# Altium PCB UE-12864LCD-V1.0.PcbDoc (part 1 of 2)
Units mm, origin at the board's own origin, x right, y up, seen from the top; angles counter-clockwise.
Board outline 230.2 x 185.24 mm, 2 copper layers (Top Layer, Bottom Layer); 288 components, 149 nets, 862 pads, 465 vias.
Unrouted connection lines stored in the file: 29.
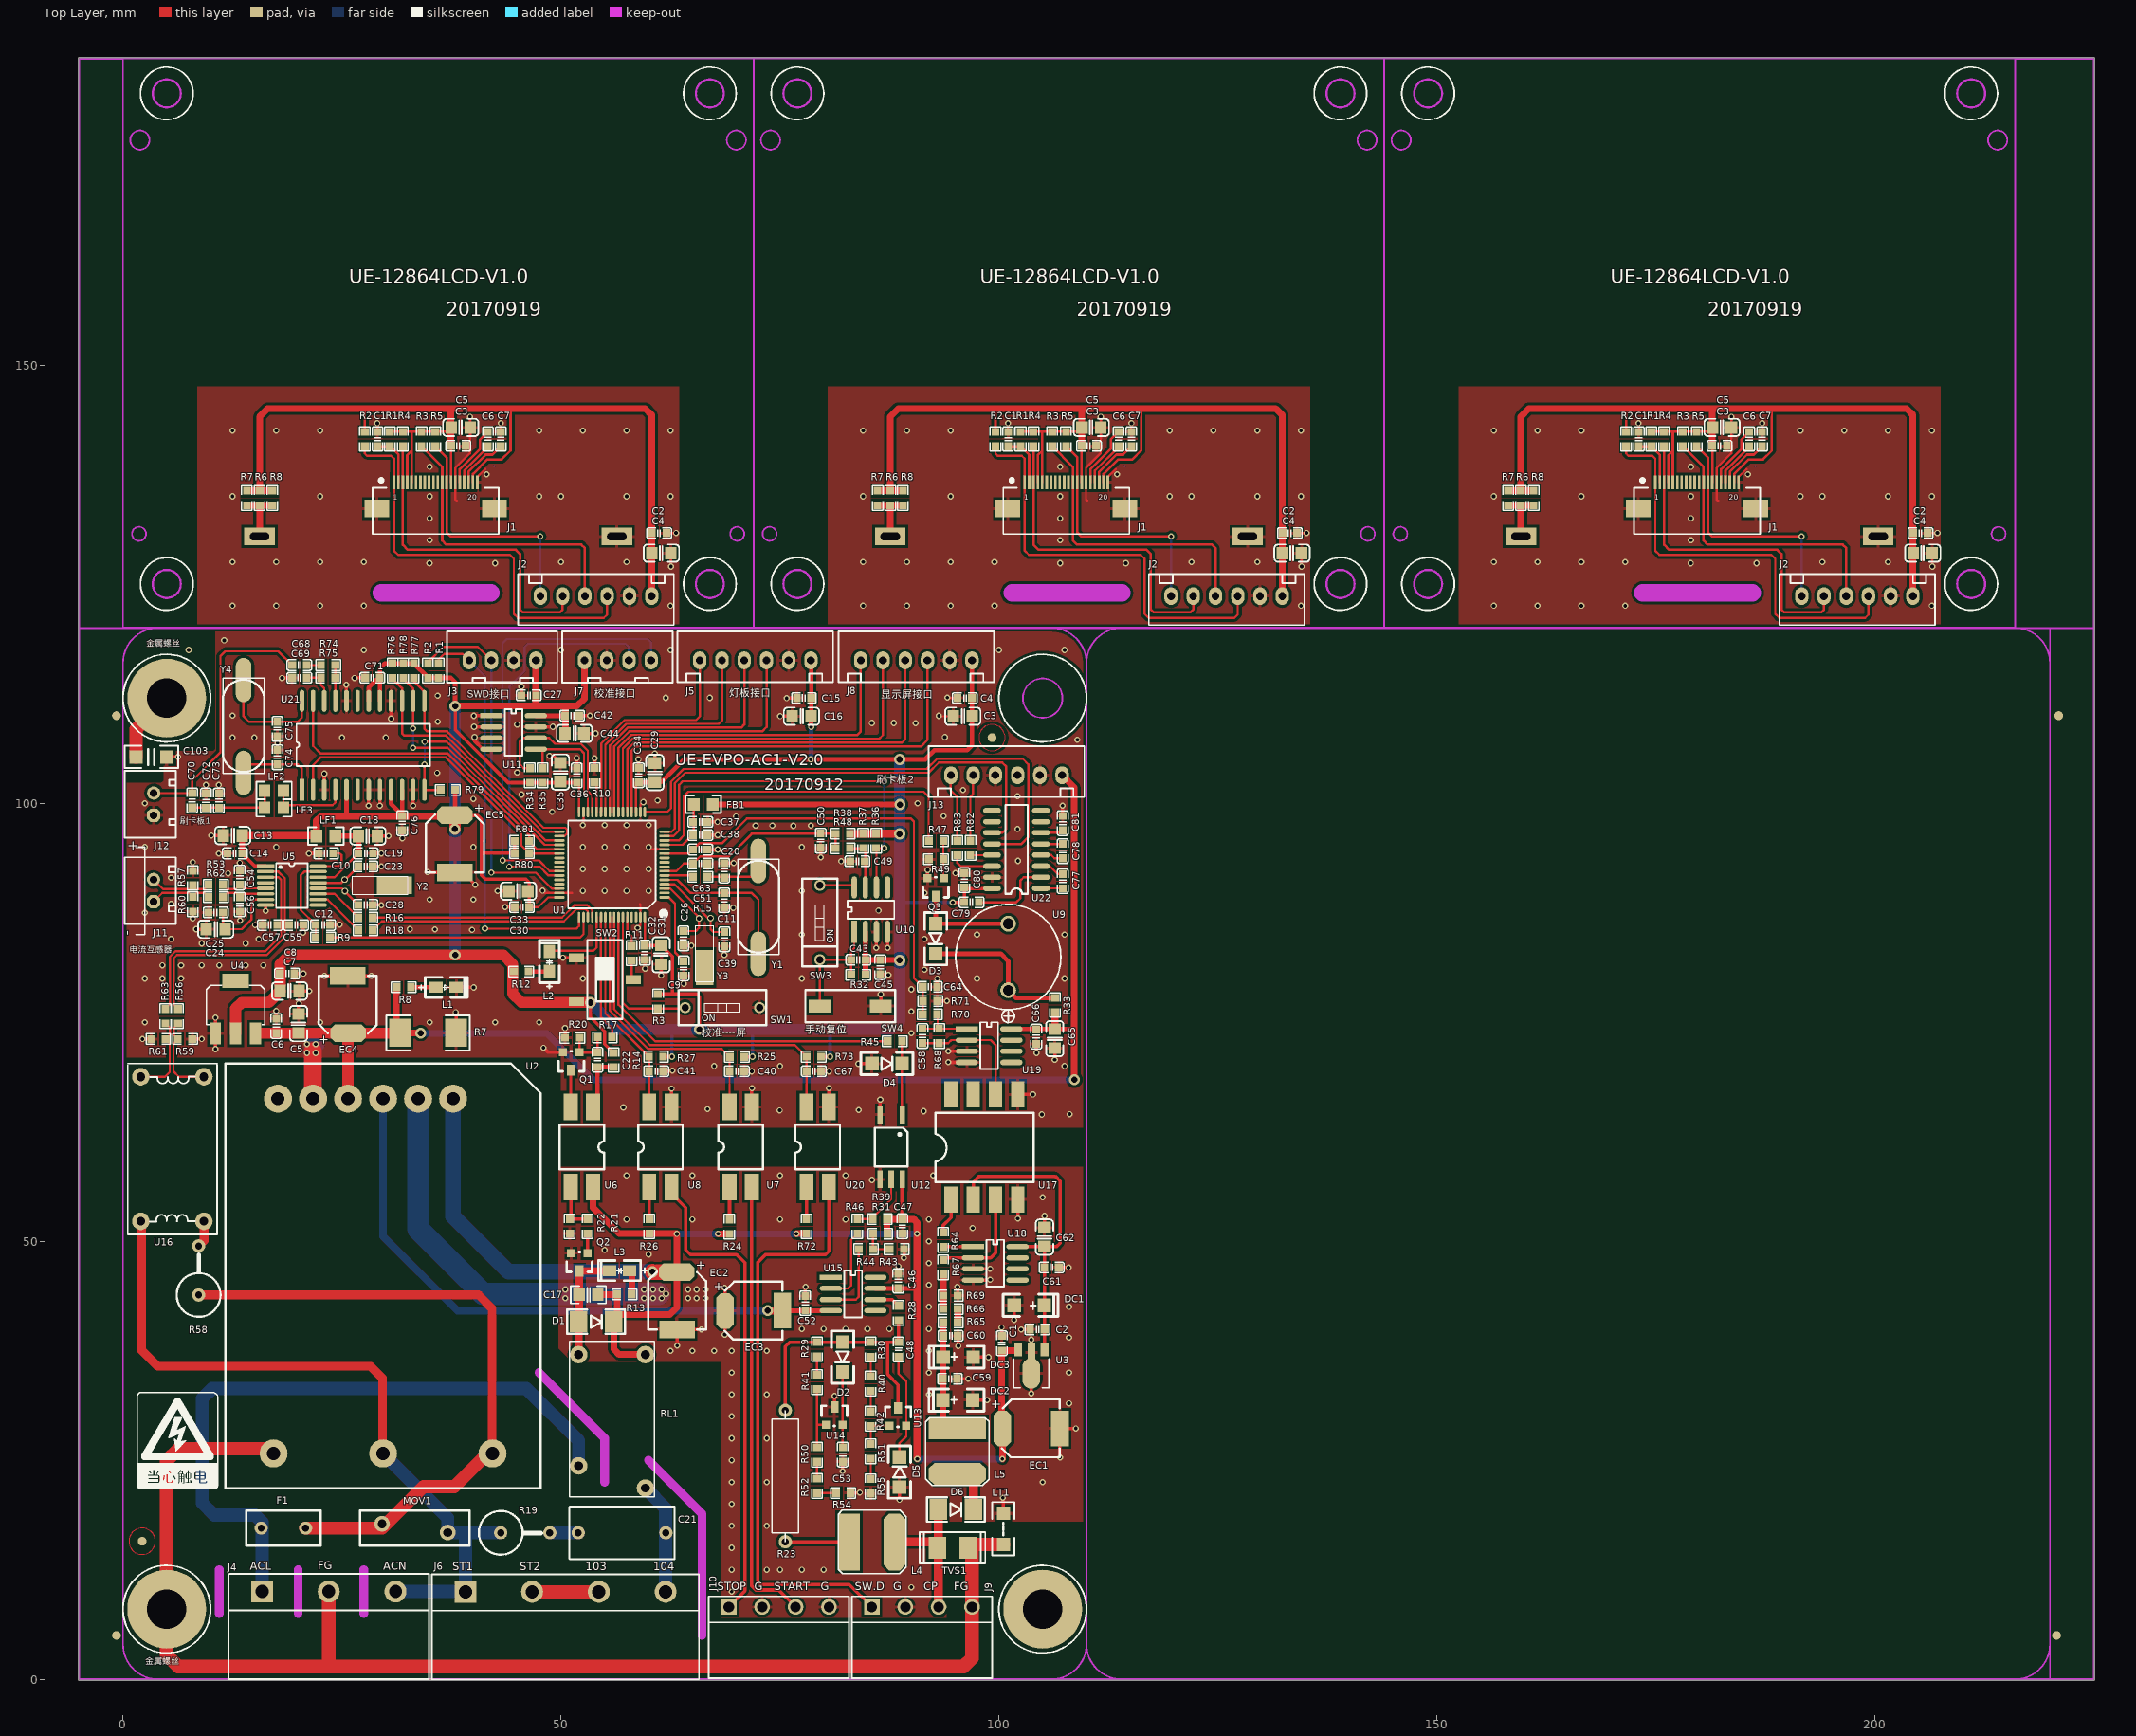
[diagram p0: Top Layer view]
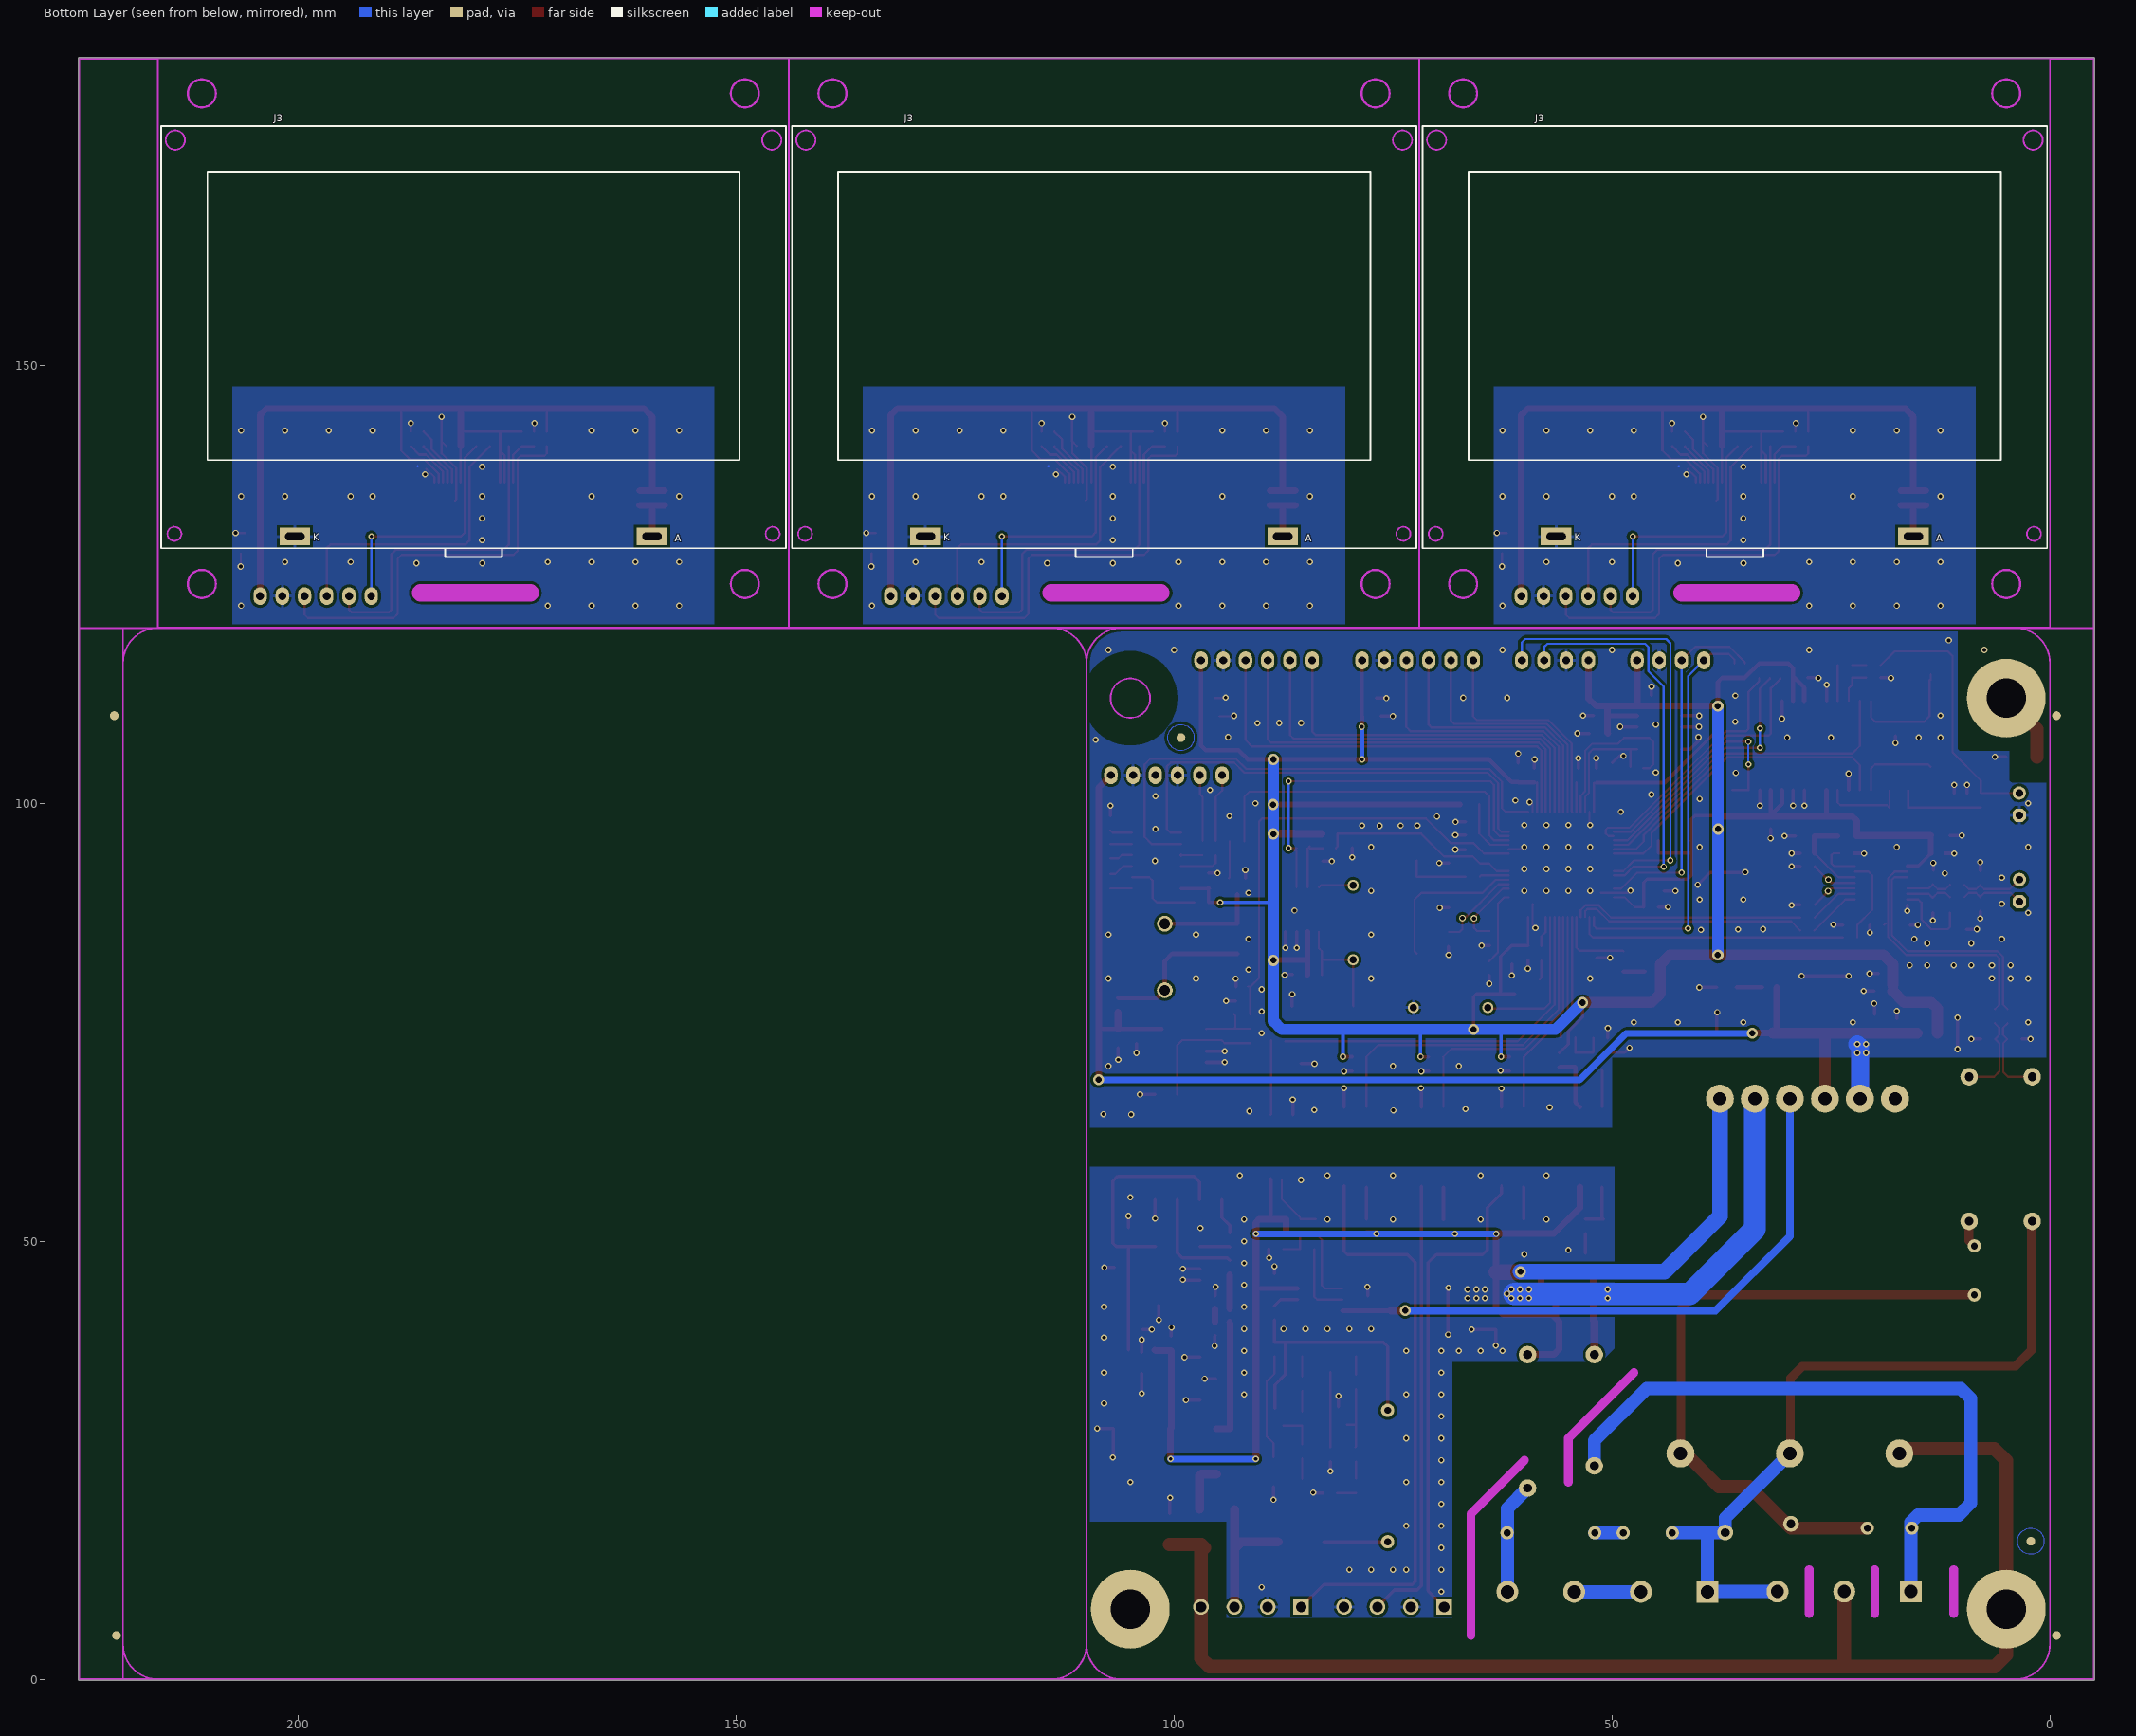
[diagram p1: Bottom Layer view, seen from below]

## Layer stack, top to bottom
Top Layer: signal copper 0.0356
Dielectric: core 0.32, FR-4, Dk 4.8
Bottom Layer: signal copper 0.0356

## Board outline
-5.1,0 ccw(c-5,0) -5,-0.1 4,-0.1 106,-0.1 225,-0.1 ccw(c225,0) 225.1,0 225.1,185 ccw(c225,185) 225,185.1 216.08,185.1 ccw(c216,185.04) 216,185.141 0,185.141 ccw(c0,185.04) -0.08,185.1 -5,185.1 ccw(c-5,185) -5.1,185

## Design rules (kind name [scope] priority, off if disabled: settings)
Clearance [InPoly] p1: gap=0.305
Clearance Clearance_1 [All] p2: gap=0.178
ComponentClearance [All] p1 off: gap=0.025 collisioncheckmode=3 verticalgap=0.025 showdistances=FALSE
FabricationTestpoint [(IsPad And (OnTopLayer Or OnBottomLayer))] p1: side=3 testpointundercomponent=TRUE minsize=1.016 maxsize=2.54 preferedsize=1.524 minholesize=0 maxholesize=1.016 preferedholesize=0.813 testpointgrid=0.025 allowsidetop=TRUE allowsidebottom=TRUE usegrid=TRUE gridtolerance=0
HoleSize [All] p1: absolutevalues=TRUE maxlimit=5.08 minlimit=0.025 maxpercent=80.000 minpercent=20.000
MinimumSolderMaskSliver [All] p1: minsoldermaskwidth=0
PolygonConnect [IsVia] p1: connectstyle=Direct reliefconductorwidth=0.254 reliefentries=4 polygonreliefangle="90 Angle" airgapwidth=0.254
PolygonConnect PolygonConnect_1 [All] p2: connectstyle=Relief reliefconductorwidth=0.381 reliefentries=4 polygonreliefangle="90 Angle" airgapwidth=0.254
RoutingVias [All] p1: holewidth=0.711 width=1.27 viastyle="Through Hole" minholewidth=0.254 minwidth=0.254 maxholewidth=0.711 maxwidth=1.27
SilkToSilkClearance [All] p1: silktosilkclearance=0
SilkToSolderMaskClearance [IsPad] p1: minsilkscreentomaskgap=0 clearancetoexposedcopper=TRUE
SolderMaskExpansion [All] p1: expansion=0.102
Width [All] p1: maxlimit=10 minlimit=0.013 preferedwidth=0.254 minimp=50.000000 maximp=50.000000 favimp=50.000000
22 further rules are at their usual default settings.

## Classes and differential pairs
component class 迷你随车充V2.0(STM32)比亚迪: C1 C2 C3 C4 C5 C6 C7 C8 C9 C10 C11 C12 C13 C14 C15 C16 C17 C18 C19 C20 C21 C22 C23 C24 C25 C26 C27 C28 C29 C30 C31 C32 C33 C34 C35 C36 C37 C38 C39 C40 C41 C42 C43 C44 C45 C46 C47 C48 C49 C50 C51 C52 C53 C54 C55 C56 C57 C58 C59 C60 C61 C62 C63 C64 C65 C66 C67 C68 C69 C70 C71 C72 C73 C74 C75 C76 C77 C78 C79 C80 C81 C103 D1 D2 D3 D4 D5 D6 DC1 DC2 DC3 EC1 EC2 EC3 EC4 EC5 F1 FB1 G J3 J4 J5 J6 J7 J8 J9 J10 J11 J12 J13 L1 L2 L3 L4 L5 LF1 LF2 LF3 LT1 MOV1 Q1 Q2 Q3 R1 R2 R3 R7 R8 R9 R10 R11 R12 R13 R14 R15 R16 R17 R18 R19 R20 R21 R22 R23 R24 R25 R26 R27 R28 R29 R30 R31 R32 R33 R34 R35 R36 R37 R38 R39 R40 R41 R42 R43 R44 R45 R46 R47 R48 R49 R50 R51 R52 R53 R54 R55 R56 R57 R58 R59 R60 R61 R62 R63 R64 R65 R66 R67 R68 R69 R70 R71 R72 R73 R74 R75 R76 R77 R78 R79 R80 R81 R82 R83 RL1 SW1 SW2 SW3 SW4 TVS1 U1 U2 U3 U4 U5 U6 U7 U8 U9 U10 U11 U12 U13 U14 U15 U16 U17 U18 U19 U20 U21 U22 Y1 Y2 Y3 Y4

## Components (designator, comment, footprint, x,y, rotation, side; value= is the part's Value field where it differs from the comment)
C1 "0.1uF" 0603C 173.058,141.579 r270 top
C1 "0.1uF" 0603C 101.058,141.579 r270 top
C1 "0.1uF" 0603C 29.058,141.579 r270 top
C1 "104" 0603C 100.33,38.354 r270 top
C2 "104" 0603C 205.214,130.835 r180 top
C2 "104" 0603C 133.214,130.835 r180 top
C2 "104" 0603C 61.214,130.835 r180 top
C2 "104" 0603C 104.394,39.929 r0 top
C3 "104" 0603C 182.278,140.792 r180 top
C3 "104" 0603C 110.278,140.792 r180 top
C3 "104" 0603C 38.278,140.792 r180 top
C3 "10uF" 0805C 95.885,109.931 r180 top
C4 "10uF" 0805C 205.468,128.549 r0 top
C4 "10uF" 0805C 133.468,128.549 r0 top
C4 "10uF" 0805C 61.468,128.549 r0 top
C4 "104" 0603C 96.114,112.014 r0 top
C5 "10uF" 0805C 182.557,142.9 r0 top
C5 "10uF" 0805C 110.557,142.9 r0 top
C5 "10uF" 0805C 38.557,142.9 r0 top
C5 "10uF" 0805C 20.041,74.854 r90 top
C6 "105" 0603C 185.656,141.579 r90 top
C6 "105" 0603C 113.656,141.579 r90 top
C6 "105" 0603C 41.656,141.579 r90 top
C6 "0.1uF" 0603C 17.501,74.574 r90 top
C7 "105" 0603C 187.129,141.579 r90 top
C7 "105" 0603C 115.129,141.579 r90 top
C7 "105" 0603C 43.129,141.579 r90 top
C7 "10uF" 0805C 19.025,78.562 r0 top
C8 "0.1uF" 0603C 18.745,80.569 r0 top
C9 "104" 0603C 64.008,81.153 r270 top
C10 "104" 0603C 23.19,94.285 r180 top
C11 "20P" 0603C 68.631,88.925 r270 top
C12 "104" 0603C 22.835,86.106 r0 top
C13 "10uF" 0805C 12.522,96.317 r180 top
C14 "104" 0603C 12.776,94.285 r180 top
C15 "0.1uF" 0603C 77.749,112.014 r180 top
C16 "10uF" 0805C 77.47,109.931 r180 top
C17 "104" 0805C 53.137,43.891 r180 top
C18 "10uF" 0805C 27.965,96.266 r0 top
C19 "104" 0603C 27.711,94.285 r0 top
C20 "20P" 0603C 68.631,92.329 r90 top
C21 "0.1uF/630V" "R1-2 卧CBB" 56.972,16.713 r0 top
C22 "104" 0603C 54.174,70.717 r90 top
C23 "20P" 0603C 27.686,92.786 r0 top
C24 "10uF" 0805C 10.592,85.623 r180 top
C25 "104" 0603C 10.592,87.528 r180 top
C26 "10P" 0603C 63.983,84.582 r270 top
C27 "104" 0603C 46.33,112.319 r0 top
C28 "20P" 0603C 27.686,88.392 r0 top
C29 "10uF" 0805C 60.731,103.505 r90 top
C30 "104" 0603C 45.542,88.138 r180 top
C31 "10uF" 0805C 61.443,82.702 r270 top
C32 "104" 0603C 59.588,82.931 r270 top
C33 "10uF" 0805C 45.136,89.967 r180 top
C34 "104" 0603C 58.877,103.2 r90 top
C35 "10uF" 0805C 49.936,103.556 r90 top
C36 "104" 0603C 51.816,103.175 r90 top
C37 "1uF" 0603C 65.913,97.866 r0 top
C38 "104" 0603C 65.913,96.368 r0 top
C39 "10P" 0603C 68.656,84.48 r270 top
C40 "104" 0603C 70.079,69.418 r0 top
C41 "104" 0603C 60.884,69.418 r0 top
C42 "0.1uF" 0603C 51.283,110.007 r0 top
C43 "104" 0603C 83.961,82.124 r180 top
C44 "10uF" 0805C 51.537,107.975 r180 top
C45 "104" 0603C 86.462,81.28 r270 top
C46 "104" 0603C 88.519,45.466 r90 top
C47 "104" 0603C 88.976,51.714 r270 top
C48 "104" 0603C 88.546,37.648 r90 top
C49 "104" 0603C 83.845,93.37 r0 top
C50 "104" 0603C 79.654,95.733 r90 top
C51 "104" 0603C 65.913,93.116 r180 top
C52 "104" 0603C 77.902,42.926 r270 top
C53 "104" 0603C 82.169,25.654 r270 top
C54 "33nF" 0603C 13.335,91.516 r90 top
C55 "33nF" 0603C 19.761,86.106 r0 top
C56 "33nF" 0603C 13.335,88.443 r270 top
C57 "33nF" 0603C 16.789,86.106 r180 top
C58 "103" 0603C 91.272,73.435 r270 top
C59 "104" 0603C 94.412,34.29 r0 top
C60 "103" 0603C 94.488,39.218 r0 top
C61 "104" 0603C 106.02,47.015 r180 top
C62 "10uF" 0805C 105.207,50.47 r90 top
C63 "104" 0603C 65.913,94.717 r180 top
C64 "103" 0603C 92.126,79.045 r180 top
C65 "10uF" 0805C 106.375,73.127 r90 top
C66 "104" 0603C 104.267,73.355 r90 top
C67 "104" 0603C 78.867,69.418 r0 top
C68 "15pF" 0603C 20.142,115.773 r0 top
C69 "103" 0603C 20.142,114.325 r180 top
C70 "27pF" 0603C 7.899,100.33 r270 top
C71 "104" 0603C 28.473,114.325 r180 top
C72 "68pF" 0603C 9.474,100.305 r270 top
C73 "15pF" 0603C 10.947,100.305 r90 top
C74 "20pF" 0603C 17.628,105.258 r90 top
C75 "20pF" 0603C 17.628,108.483 r90 top
C76 "104" 0603C 31.877,97.739 r90 top
C77 "0.1uF" 0603C 107.29,91.11 r270 top
C78 "0.1uF" 0603C 107.29,94.539 r270 top
C79 "0.1uF" 0603C 96.876,88.697 r180 top
C80 "1uF" 0603C 96.063,91.211 r270 top
C81 "0.1uF" 0603C 107.29,97.739 r270 top
C103 "102" 1206C 3.251,105.283 r0 top
D1 "1N4007" DO-214AC 54.026,40.818 r0 top
D2 "1N4148" 1206D 82.171,36.779 r270 top
D3 "1N4148" 1206D 92.786,84.531 r270 top
D4 "1N4148" 1206D 87.224,70.282 r0 top
D5 "1N4148" 1206D 88.646,23.647 r90 top
D6 "1N4007" DO-214AC 95.098,19.38 r0 top
DC1 "10uF,16V" CA1206 105.181,42.697 r0 top
DC2 "10uF,16V" CA1206 93.599,31.852 r180 top
DC3 "10uF,16V" CA1206 93.624,36.754 r180 top
EC1 "100uF,25V" C100UF16VEJ 100.406,28.626 r0 top
EC2 "100uF,25V" C100UF16VEJ 63.246,46.482 r270 top
EC3 "100uF,25V" C100UF16VEJ 68.732,42.062 r0 top
EC4 "100uF,25V" C100UF16VEJ 25.679,73.736 r90 top
EC5 "100uF,16V" C100UF16VEJ 37.897,98.654 r270 top
F1 "2A/250V" 方形保险丝 18.313,17.247 r180 top
FB1 "220R @ 100MHZ" 0805R 66.243,99.873 r180 top
J1 "CON20" FPC20-0.5mm 179.698,135.139 r0 top
J1 "CON20" FPC20-0.5mm 107.698,135.139 r0 top
J1 "CON20" FPC20-0.5mm 35.698,135.139 r0 top
J2 "CON6" CON06_2.54 204.35,123.647 r180 top
J2 "CON6" CON06_2.54 132.35,123.647 r180 top
J2 "CON6" CON06_2.54 60.35,123.647 r180 top
J3 "CON2" JXL12864G-1504 215.628,129.108 r180 bottom
J3 "CON2" JXL12864G-1504 143.628,129.108 r180 bottom
J3 "CON2" JXL12864G-1504 71.628,129.108 r180 bottom
J3 "CON4" CON04_2.54 43.332,116.307 r0 top
J4 "CON3" LS-3P-7.62MM 23.495,10.008 r0 top
J5 "CON6" CON06_2.54 65.837,116.307 r0 top
J6 "CON4" LS-4P-7.62MM 50.521,9.982 r0 top
J7 "CON4" CON04_2.54 56.49,116.307 r0 top
J8 "CON6" CON06_2.54 84.226,116.307 r0 top
J9 "CON4" KF2EDG-4P-3.81MM 85.496,8.255 r0 top
J10 "CON4" KF2EDG-4P-3.81MM 69.164,8.255 r0 top
J11 "CON2" CON2P 3.48,88.748 r90 top
J12 "CON2" CON2P 3.505,98.628 r90 top
J13 "CON6" CON06_2.54 94.513,103.2 r0 top
L1 "Green" D0805 35.763,78.994 r90 top
L2 "Green" D0805 48.683,80.795 r180 top
L3 "Green" D0805 57.836,46.634 r270 top
L4 "100uH" LC7*7*3 85.496,15.672 r180 top
L5 "100uH" LC7*7*3 95.25,26.035 r90 top
LF1 "1.0uH" 0805R 23.165,96.266 r0 top
LF2 "1.0uH" 0805R 17.247,101.448 r0 top
LF3 "1.0uH" 0805R 17.247,99.466 r0 top
LT1 "10uH" 1206L 100.508,17.17 r270 top
MOV1 "14D471K" 10D471K 33.325,17.247 r180 top
Q1 "9013" SOT23 52.117,71.583 r180 top
Q2 "9013" SOT23 53.061,48.666 r180 top
Q3 "8050" SOT23 93.751,91.44 r180 top
R1 "10K" 0603R 174.48,141.579 r270 top
R1 "10K" 0603R 102.48,141.579 r270 top
R1 "10K" 0603R 30.48,141.579 r270 top
R1 "10K" 0603R 36.017,115.138 r270 top
R2 "10K" 0603R 171.61,141.58 r90 top
R2 "10K" 0603R 99.61,141.58 r90 top
R2 "10K" 0603R 27.61,141.58 r90 top
R2 "10K" 0603R 34.823,115.138 r270 top
R3 "10K" 0603R 178.087,141.58 r90 top
R3 "10K" 0603R 106.087,141.58 r90 top
R3 "10K" 0603R 34.087,141.58 r90 top
R3 "10K" 0603R 61.087,77.394 r270 top
R4 "10K" 0603R 175.953,141.58 r90 top
R4 "10K" 0603R 103.953,141.58 r90 top
R4 "10K" 0603R 31.953,141.58 r90 top
R5 "10K" 0603R 179.662,141.58 r90 top
R5 "10K" 0603R 107.662,141.58 r90 top
R5 "10K" 0603R 35.662,141.58 r90 top
R6 "47R" 0603R 159.596,134.849 r270 top
R6 "47R" 0603R 87.596,134.849 r270 top
R6 "47R" 0603R 15.596,134.849 r270 top
R7 "47R" 0603R 158.148,134.849 r270 top
R7 "47R" 0603R 86.148,134.849 r270 top
R7 "47R" 0603R 14.148,134.849 r270 top
R7 "100R" 2512R 34.823,73.787 r180 top
R8 "47R" 0603R 161.043,134.849 r270 top
R8 "47R" 0603R 89.043,134.849 r270 top
R8 "47R" 0603R 17.043,134.849 r270 top
R8 "1.5K" 0603R 32.055,78.994 r0 top
R9 "47R" 0603R 22.835,84.684 r0 top
R10 "10K" 0603R 53.848,103.2 r270 top
R11 "10K" 0603R 58.064,82.88 r90 top
R12 "1.5K" 0603R 45.466,80.797 r180 top
R13 "10K" 0603R 57.252,43.917 r180 top
R14 "2K" 0603R 56.007,70.688 r90 top
R15 "200R" 0603R 65.913,91.618 r180 top
R16 "10R" 0603R 27.686,86.944 r0 top
R17 "10K" 0603R 55.016,73.279 r0 top
R18 "10R" 0603R 27.686,85.496 r0 top
R19 "100R/2W" R1-2 43.129,16.713 r0 top
R20 "3K" 0603R 51.308,73.228 r180 top
R21 "5.1K" 0603R 53.035,51.689 r270 top
R22 "4K7" 0603R 51.003,51.689 r270 top
R23 "1K /1W" R1-1 75.616,23.19 r270 top
R24 "10K" 0603R 69.24,51.664 r270 top
R25 "10K" 0603R 70.104,71.044 r0 top
R26 "10K" 0603R 60.096,51.689 r270 top
R27 "10K" 0603R 60.858,71.069 r0 top
R28 "10R" 0603R 88.544,41.808 r90 top
R29 "20K/1%" 0603R 79.224,37.674 r90 top
R30 "4K7/1%" 0603R 85.371,37.648 r90 top
R31 "100K" 0603R 86.462,50.851 r180 top
R32 "10K" 0603R 83.961,80.422 r0 top
R33 "10R" 0603R 106.401,76.962 r270 top
R34 "10k" 0603R 46.457,103.175 r90 top
R35 "10K" 0603R 47.904,103.175 r90 top
R36 "10K" 0603R 85.979,95.707 r270 top
R37 "10K" 0603R 84.506,95.707 r270 top
R38 "10K" 0603R 82.169,96.52 r180 top
R39 "100K" 0603R 86.411,52.527 r180 top
R40 "51R/1%" 0603R 85.371,33.738 r90 top
R41 "2K7/1%" 0603R 79.224,33.934 r90 top
R42 "1K1/1%" 0603R 85.371,29.743 r90 top
R43 "100K" 0603R 88.341,49.098 r0 top
R44 "10K" 0603R 84.836,49.098 r0 top
R45 "200R" 0603R 88.113,72.822 r0 top
R46 "10K" 0603R 83.845,51.689 r90 top
R47 "4K7" 0603R 92.837,95.682 r180 top
R48 "47R" 0603R 82.169,94.869 r180 top
R49 "10K" 0603R 92.837,93.599 r0 top
R50 "1K1/1%" 0603R 79.224,25.654 r90 top
R51 "2K7/1%" 0603R 85.371,26.015 r90 top
R52 "51R/1%" 0603R 79.224,22.073 r90 top
R53 "1.2K" 0603R 10.592,90.678 r0 top
R54 "4K7/1%" 0603R 82.22,21.26 r180 top
R55 "20K/1%" 0603R 85.371,22.022 r90 top
R56 "1.2K" 0603R 6.274,75.692 r90 top
R57 "22R,1%" 0603R 7.976,91.465 r270 top
R58 "110K/1W" R1-2 8.636,43.866 r90 top
R59 "75R,1%(原100)" 0603R 7.087,73.083 r180 top
R60 "22R,1%" 0603R 7.976,88.468 r270 top
R61 "75R,1%" 0603R 4.039,73.076 r180 top
R62 "1.2K" 0603R 10.592,89.281 r0 top
R63 "1.2K" 0603R 4.851,75.692 r90 top
R64 "200R/1%" 0603R 93.65,50.165 r90 top
R65 "33K/1%" 0603R 94.488,40.742 r0 top
R66 "33K/1%" 0603R 94.488,42.266 r180 top
R67 "31K6/1%" 0603R 93.65,47.015 r90 top
R68 "31K6/1%" 0603R 93.177,73.435 r270 top
R69 "10K/1%" 0603R 94.488,43.79 r180 top
R70 "10K/1%" 0603R 92.126,75.921 r180 top
R71 "10K/1%" 0603R 92.151,77.419 r0 top
R72 "10K" 0603R 78.029,51.689 r270 top
R73 "10K" 0603R 78.867,71.069 r0 top
R74 "2K7" 0603R 23.419,115.773 r180 top
R75 "820R" 0603R 23.419,114.325 r0 top
R76 "10K" 0603R 30.785,115.138 r90 top
R77 "10K" 0603R 33.198,115.138 r90 top
R78 "10K" 0603R 32.004,115.138 r90 top
R79 "10K" 0603R 37.084,101.524 r0 top
R80 "10K" 0603R 45.542,94.31 r180 top
R81 "10K" 0603R 45.542,95.707 r180 top
R82 "10R" 0603R 96.749,94.894 r90 top
R83 "10R" 0603R 95.25,94.894 r90 top
RL1 "JQ1P-12V" HF32F-12V 53.035,37.059 r90 top
SW1 "排针" SW1 64.16,76.683 r270 top
SW2 "K3-1235S-F1" K3-1235S-F1 55.016,79.858 r270 top
SW3 "拨码开关" SW1 79.553,82.118 r0 top
SW4 "按键" SW 83.033,76.835 r0 top
TVS1 "BA301N" 3528TVS 94.75,15 r0 top
U1 "STM32F103R8T6" LQFP64 61.824,89.256 r90 top
U2 "LH05-10C0515-01" LH05-10C0515-01 29.693,46.025 r90 top
U3 "LM78L05" SOT-89 105.207,37.592 r180 top
U4 "AMS1117-3.3" SOT223 12.852,76.733 r0 top
U5 "HT7017/3.3V" SSOP16 19.279,90.602 r0 top
U6 "PS2501L-1" DIP-4 53.67,65.311 r0 top
U7 "PS2501L-1" DIP-4 69.24,56.197 r180 top
U8 "PS2501L-1" DIP-4 60.071,56.197 r180 top
U9 "BELL" BUZZ 101.067,82.448 r270 top
U10 "SP706SEN" SOP8 83.49,85.319 r90 top
U11 "AT24C16" SOP8 42.062,109.982 r0 top
U12 "TLP114" P113 88.96,64.455 r270 top
U13 "TL431" SOT23 87.528,28.905 r0 top
U14 "TL431" SOT23 80.264,29.032 r0 top
U15 "LM218D" SOP8 80.823,45.872 r0 top
U16 "ZMPT107/2mA:2mA" ZMPT107 5.639,60.528 r90 top
U17 "HCNR201" "HCNR201 - S" 94.541,54.754 r90 top
U18 "LM258" SOP8 97.053,49.378 r0 top
U19 "LM258" SOP8 96.352,74.222 r0 top
U20 "PS2501L-1" DIP-4 78.029,56.197 r180 top
U21 "FM1702SL" SOP24 20.447,101.549 r0 top
U22 "SP3232EEN" SO-16 104.8,90.272 r180 top
Y1 "8M" ZS_SMD 72.542,88.113 r90 top
Y2 "6M" ZS-32.768 28.067,90.627 r0 top
Y3 "32.768KHz" ZS-32.768 66.421,84.125 r270 top
Y4 "13.560M" ZS_SMD 13.767,108.763 r90 top

## Footprints (in the part's own frame and the unit in brackets; to place one, negate y for a bottom-side part, rotate by r counter-clockwise, add the part's x,y. Pads: shape width x height; smd on the part's side, far side on the other; paste and mask are expansions set on the pad)
10D471K [mm]
  round 1.8 hole 1: 1(-3.75,0.5) 2(3.75,-0.5)
  silkscreen extent -6.25,-2 6.25,2
0603C [mil]
  rect 35x35 smd: 1(-32.5,0) 2(32.5,0)
  silkscreen extent -55,-24 55,24
0603R [mil]
  rect 35x35 smd: 1(-32.5,0) 2(32.5,0)
  silkscreen extent -55,-24 55,24
0805C [mil]
  rect 52x56 smd: 1(-42.5,0) 2(42.5,0)
  silkscreen extent -80,-39 80,39
0805R [mil]
  rect 52x56 smd: 1(-42.5,0) 2(42.5,0)
  silkscreen extent -80,-39 79,39
1206C [mil]
  rect 60x60 smd: 1(-70,0) 2(70,0)
  silkscreen extent -120,-50 120,50
1206D [mil]
  rect 60x60 smd: 1(-67.5,0) 2(67.5,0)
  silkscreen extent -118,-50 117,50
1206L [mil]
  rect 60x60 smd: 1(-70,0) 2(70,0)
  silkscreen extent -120,-50 120,50
2512R [mm]
  rect 2.5x3.2 smd: 1(-3.2,0) 2(3.2,0)
  silkscreen extent -4.75,-2 4.75,2
3528TVS [mil]
  rect 80x100 smd: 1(70,0) 2(-70,0)
  silkscreen extent -150,-70 146,70
BUZZ [mm]
  round 1.8 hole 1.2: 1(3.8,0) 2(-3.8,0)
  silkscreen extent -6,-6 7.47,6
C100UF16VEJ [mil]
  oct 80x160 smd: 1(-0.01,-0.43)
  rect 80x160 smd: 2(257.94,0.35)
  silkscreen extent -2,-130 258,130
CA1206 [mil]
  rect 60x60 smd: 1(-0.08,-0.48) 2(-135.08,-0.48)
  silkscreen extent -185,-50 62,50
CON2P [mil]
  oct 60x60 hole 33.47: 1(0.08,-0.13)
  round 60 hole 33.47: 2(100.08,-0.13)
  silkscreen extent -100,-100 200,130
CON04_2.54 [mil]
  oval 60x80 hole 35: 1(-150,0) 2(-50,0) 3(50,0) 4(150,0)
  silkscreen extent -250,-100 246,130
CON06_2.54 [mil]
  oval 60x80 hole 35: 1(0,0) 2(100,0) 3(200,0) 4(300,0) 5(400,0) 6(500,0)
  silkscreen extent -100,-98 600,130
D0805 [mil]
  rect 50x60 smd: 1(-0.34,-0.09) 2(-0.34,-90.09)
  silkscreen extent -45,-140 45,77
DIP-4 [mm]
  rect 1.6x3 smd: 1(-0.008,0.015) 2(-2.548,0.015) 3(-2.548,-9.129) 4(-0.008,-9.129)
  silkscreen extent -3.82,-7.1 1.26,-2.02
DO-214AC [mm]
  rect 2x2.4 smd: 1(-2,0) 2(2,0)
  silkscreen extent -3.3,-1.4 3.3,1.4
FPC20-0.5mm [mm]
  rect 0.3x1.6 smd: 1(-4.75,1.5) 2(-4.25,1.5) 3(-3.75,1.5) 4(-3.25,1.5) 5(-2.75,1.5) 6(-2.25,1.5) 7(-1.75,1.5) 8(-1.25,1.5) 9(-0.75,1.5) 10(-0.25,1.5) 11(0.25,1.5) 12(0.75,1.5) 13(1.25,1.5) 14(1.75,1.5) 15(2.25,1.5) 16(2.75,1.5) 17(3.25,1.5) 18(3.75,1.5) 19(4.25,1.5) 20(4.75,1.5)
  rect 2.8x2 smd: 21(-6.7,-1.5) 22(6.7,-1.5)
  silkscreen extent -7.2,-4.4 7.2,1.85
"HCNR201 - S" [mm]
  rect 3x1.5 smd: 1(0,0) 2(0,-2.54) 3(0,-5.08) 4(0,-7.62) 5(12,-7.62) 6(12,-5.08) 7(12,-2.54) 8(12,0)
  silkscreen extent 2,-9.41 9.9,1.79
HF32F-12V [mm]
  round 2 hole 1: 1(0,1.016) 2(0,-6.604) 3(-12.7,1.016) 4(-15.24,-6.604)
  silkscreen extent -16.26,-7.62 1.52,2.03
JXL12864G-1504 [mm]
  rect 3.5x2 hole 0.9 slot 2.2 at 0 deg: 1(56.032,1.346) 2(15.25,1.346)
  Keep-Out Layer circle w0.2: c1.5,1.65 r0.8
  Keep-Out Layer circle w0.2: c69.8,1.65 r0.8
  Keep-Out Layer circle w0.2: c69.7,46.6 r1.1
  Keep-Out Layer circle w0.2: c1.6,46.6 r1.1
  silkscreen extent 0,-1 71.3,48.2
K3-1235S-F1 [mm]
  rect 1x1.7 smd: 1(-2.5,-3.25) 2(0,3.25) 3(2.5,-3.25)
  silkscreen extent -4.5,-2 4.5,2
KF2EDG-4P-3.81MM [mm]
  rect 1.8x1.8 hole 1.2: 1(0,0)
  round 1.8 hole 1.2: 2(3.81,0) 3(7.62,0) 4(11.43,0)
  silkscreen extent -2.3,-8.15 13.74,1.2
LC7*7*3 [mm]
  oct 2.5x6.5 smd: 1(-2.6,0)
  rect 2.5x6.5 smd: 2(2.6,0)
  silkscreen extent -3.94,-3.61 3.84,3.61
LH05-10C0515-01 [mm] "48.5*36*20.5"
  round 3.2 hole 1.5: 1(-20.25,12.5) 2(-20.25,0) 3(-20.25,-12.5) 4(20.25,8) 5(20.25,4) 6(20.25,0) 7(20.25,-4) 8(20.25,-8) ""(20.25,12)
  silkscreen extent -24.25,-18 24.25,18
LQFP64 [mm]
  oval 0.3x1.2 smd: 1(0,0) 2(0.5,0) 3(1,0) 4(1.5,0) 5(2,0) 6(2.5,0) 7(3,0) 8(3.5,0) 9(4,0) 10(4.5,0) 11(5,0) 12(5.5,0) 13(6,0) 14(6.5,0) 15(7,0) 16(7.5,0) 33(7.5,12) 34(7,12) 35(6.5,12) 36(6,12) 37(5.5,12) 38(5,12) 39(4.5,12) 40(4,12) 41(3.5,12) 42(3,12) 43(2.5,12) 44(2,12) 45(1.5,12) 46(1,12) 47(0.5,12) 48(0,12)
  oval 1.2x0.3 smd: 17(9.75,2.25) 18(9.75,2.75) 19(9.75,3.25) 20(9.75,3.75) 21(9.75,4.25) 22(9.75,4.75) 23(9.75,5.25) 24(9.75,5.75) 25(9.75,6.25) 26(9.75,6.75) 27(9.75,7.25) 28(9.75,7.75) 29(9.75,8.25) 30(9.75,8.75) 31(9.75,9.25) 32(9.75,9.75) 49(-2.25,9.75) 50(-2.25,9.25) 51(-2.25,8.75) 52(-2.25,8.25) 53(-2.25,7.75) 54(-2.25,7.25) 55(-2.25,6.75) 56(-2.25,6.25) 57(-2.25,5.75) 58(-2.25,5.25) 59(-2.25,4.75) 60(-2.25,4.25) 61(-2.25,3.75) 62(-2.25,3.25) 63(-2.25,2.75) 64(-2.25,2.25)
  silkscreen extent -1.92,0.04 8.75,11
LS-3P-7.62MM [mm]
  rect 2.5x2.5 hole 1.5: 1(-7.62,0)
  round 2.5 hole 1.5: 2(0,0) 3(7.62,0)
  silkscreen extent -11.45,-10 11.45,2
LS-4P-7.62MM [mm]
  rect 2.5x2.5 hole 1.5: 1(-11.43,0)
  round 2.5 hole 1.5: 2(-3.81,0) 3(3.81,0) 4(11.43,0)
  silkscreen extent -15.26,-10 15.24,2
P113 [mm]
  rect 2x0.6 smd: 1(0.001,0.012) 3(0.001,-2.528) 4(7.401,-2.528) 5(7.401,-1.258) 6(7.401,0.012)
  silkscreen extent 1.5,-3.11 5.9,0.59
R1-1 [mm]
  round 1.524 hole 0.8: 1(-7.5,0) 2(7.5,0)
  silkscreen extent -7.5,-1.5 7.5,1.5
R1-2 [mil]
  round 60 hole 31.5: 1(0,0) 2(220.47,0)
  silkscreen extent -98,-98 181,98
"R1-2 卧CBB" [mm]
  round 1.524 hole 0.8: 1(-5,0) 2(5,0)
  silkscreen extent -6,-3 6,3
SO-16 [mil]
  oval 80x24 smd: 1(-0.2,-0.3) 2(-0.2,-50.3) 3(-0.2,-100.3) 4(-0.2,-150.3) 5(-0.2,-200.3) 6(-0.2,-250.3) 7(-0.2,-300.3) 8(-0.2,-350.3) 9(219.8,-350.3) 10(219.8,-300.3) 11(219.8,-250.3) 12(219.8,-200.3) 13(219.8,-150.3) 14(219.8,-100.3) 15(219.8,-50.3) 16(219.8,-0.3)
  silkscreen extent 60,-375 160,25
SOP8 [mm]
  rect 2.54x0.6 smd: 1(-0.006,0.006)
  oval 2.54x0.6 smd: 2(-0.006,-1.264) 3(-0.006,-2.534) 4(-0.006,-3.804) 5(5.074,-3.804) 6(5.074,-2.534) 7(5.074,-1.264) 8(5.074,0.006)
  silkscreen extent 1.52,-4.57 3.55,0.77
SOP24 [mm]
  rect 0.51x2.5 smd: 1(-0.009,-0.022)
  oval 0.51x2.5 smd: 2(1.261,-0.022) 3(2.531,-0.022) 4(3.801,-0.022) 5(5.071,-0.022) 6(6.341,-0.022) 7(7.611,-0.022) 8(8.881,-0.022) 9(10.151,-0.022) 10(11.421,-0.022) 11(12.691,-0.022) 12(13.961,-0.022) 13(13.961,10.138) 14(12.691,10.138) 15(11.421,10.138) 16(10.151,10.138) 17(8.881,10.138) 18(7.611,10.138) 19(6.341,10.138) 20(5.071,10.138) 21(3.801,10.138) 22(2.531,10.138) 23(1.261,10.138) 24(-0.009,10.138)
  silkscreen extent -0.64,2.7 14.6,7.53
SOT23 [mil]
  rect 36x36 smd: 1(-0.08,0.75) 3(74.92,0.75)
  rect 36x50 smd: 2(37.92,80.75)
  silkscreen extent -20,-4 95,86
SOT223 [mm]
  rect 1.3x2.5 smd: 1(-2.3,-3) 2(0,-3) 3(2.3,-3)
  rect 3x1.65 smd: 4(0,3)
  silkscreen extent -3.35,-2.01 3.35,2.5
SOT-89 [mm]
  rect 0.9x1.473 smd: 1(0,0.006) 3(2.994,0.006)
  rect 0.9x2 smd: 2(1.494,0.273)
  oval 2.032x3.5 smd: 2(1.519,2.686)
  silkscreen extent -0.53,1.02 3.53,4.32
SSOP16 [mm]
  rect 2x0.4 smd: 1(-3,2.222)
  oval 2x0.4 smd: 2(-3,1.587) 3(-3,0.953) 4(-3,0.318) 5(-3,-0.318) 6(-3,-0.953) 7(-3,-1.587) 8(-3,-2.222) 9(3,-2.222) 10(3,-1.587) 11(3,-0.953) 12(3,-0.318) 13(3,0.318) 14(3,0.953) 15(3,1.587) 16(3,2.222)
  silkscreen extent -1.8,-2.54 1.8,2.54
SW [mm]
  rect 2.5x1.5 smd: 1(-3.5,0) 2(3.5,0)
  silkscreen extent -5.13,-1.85 5.13,1.85
SW1 [mm]
  round 1.27 hole 0.8: 1(0.011,0.015) 2(0.011,8.515)
  silkscreen extent -1.99,-0.74 2.01,9.26
ZMPT107 [mm]
  round 2 hole 1: 1(8.25,-3.6) 2(8.25,3.6) 3(-8.25,-3.6) 4(-8.25,3.6)
  silkscreen extent -9.75,-5.1 9.75,5.1
ZS-32.768 [mil]
  round 30 hole 20: 1(-107.67,-26) 2(-108.67,26)
  rect 157.48x78.74 smd: 3(114,0)
  silkscreen extent -75,-40 175,40
ZS_SMD [mm]
  oval 5.08x1.778 smd: 1(-5.3,0) 2(5.3,0)
  silkscreen extent -5.36,-2.38 5.51,2.35
方形保险丝 [mm]
  round 1.5 hole 0.8: 1(-2.54,0) 2(2.54,0)
  silkscreen extent -4.25,-2 4.25,2

## Part data
C1 C1 C1 C42 C43 C45 C46 C47 C48 C49 C50 C51 C52 C53 C59 C61 C63 C65 C66: library part CAP1, "0603贴片电容/50V/0.1uF/±10%/X7R"
C1 C2 C27: library part CAP, "0805贴片电容/50V/0.1uF/±10%/X7R"
C2 C2 C2 C3 C3 C3 C4 C5 C6 C6 C6 C6 C7 C7 C7 C7 C8 C12 C17 C21 C22 C44 C68 C69 C70 C71 C72 C73 C74 C75 C76 C77 C78 C79 C80 C81 C103: library part CAP, "Capacitor"
C3 C4 C4 C4 C5 C5 C5 C9 C10 C11 C13 C14 C18 C19 C20 C23 C24 C25 C26 C28 C29 C30 C31 C32 C33 C34 C35 C36 C37 C38 C39 C62: library part CAP1
C15: library part CAP, "0603贴片电容/50V/100nF/±10%/X7R"
C16: library part Cap, "0805贴片电容/25V/10uF/±10%/X7R"
C40 C41 C67: library part CAP, "0603贴片电容/50V/0.1uF/±10%/X7R"
C54 C55 C56 C57: library part CAP1, "0603贴片电容/50V/33nF/±10%/X7R"
C58 C60 C64: library part CAP1, "0603贴片电容/50V/10nF/±10%/X7R"
D1 D3: library part DIODE
D2 D4 D5: library part DIODE, "贴片二极管/1N4148/LL34/长电"
D6: library part DIODE, "贴片二极管/1N4007/DO-214AC/长电"
DC1 DC2 DC3: library part CAP2, "贴片钽电容/16V/10uF/A型3216/AVX"
EC1 EC2 EC3 EC4: library part "CAPACITOR POL", "贴片铝电解电容/16V/100uF/6.3*5.4"
EC5: library part "CAPACITOR POL", "Capacitor"
F1: library part FUSE
FB1: library part FERRITE-BEAD, "CBG201209U221"
J1 J1 J1 J2 J2 J2 J3 J3 J3 J3 J4 J5 J6 J7 J8 J9 J10 J11 J12 J13: "Connector"
L1 L2 L3: library part LED, "17-21/GHC-XS1T2M/3T,绿色LED/0805/亿光"
L4 LF1 LF2 LF3 LT1: library part INDUCTOR
L5: library part INDUCTOR, "贴片功率电感/100uH/LC7*7*3"
MOV1: library part NTC
Q1 Q2 Q3: library part NPN
R1 R1 R1 R25 R27 R32 R34 R35 R36 R37 R38 R44 R46 R73: library part RES1, "0603贴片电阻/10K/0.1W/±5%"
R1 R2 R3 R9 R10 R11 R13 R14 R15 R17 R19 R20 R21 R22 R58: library part RES1
R2 R2 R2 R3 R3 R3 R4 R4 R4 R5 R5 R5 R6 R6 R6 R7 R7 R7 R8 R8 R8 R8 R16 R18 R33 R47 R49 R74 R75 R76 R77 R78 R79 R80 R81 R82 R83: library part RES-1, "RES"
R7: library part RES1, "0603贴片电阻/2K/0.1W/±1%"
R12 R45: library part RES1, "0603贴片电阻/200R/0.1W/±5%"
R23: library part RES2, "五色环/轴状/金属膜电阻/1K/1W/±1%"
R24 R26 R72: library part RES1, "0603贴片电阻/2K/0.1W/±5%"
R28: library part RES1, "0603贴片电阻/10R/0.1W/±5%"
R29 R55: library part RES1, "0603贴片电阻/20K/0.1W/±1%"
R30 R54: library part RES1, "0603贴片电阻/4.7K/0.1W/±1%"
R31 R39 R43: library part RES1, "0603贴片电阻/100K/0.1W/±5%"
R40 R52: library part RES1, "0603贴片电阻/51R/0.1W/±1%"
R41 R51: library part RES1, "0603贴片电阻/2.7K/0.1W/±1%"
R42 R50: library part RES1, "0603贴片电阻/1.1K/0.1W/±1%"
R48: library part RES1, "0603贴片电阻/47R/0.1W/±5%"
R53 R56 R62 R63: library part RES1, "0603贴片电阻/1.2K/0.1W/±5%"
R57 R59 R60 R61: library part RES-1, "0603贴片电阻/2R/0.1W/±5%"
R64: library part RES1, "0603贴片电阻/200R/0.1W/±1%"
R65 R66: library part RES1, "0603贴片电阻/33K/0.1W/±1%"
R67 R68: library part RES1, "0603贴片电阻/31.6K/0.1W/±1%"
R69 R70 R71: library part RES1, "0603贴片电阻/10K/0.1W/±1%"
SW1: library part "SW SPST"
SW2: library part SW3P
SW3: library part "SW SPST", "直插拔码开关1位/DIP2/蓝色/脚距8mm"
SW4: library part SW-PB, "贴片轻触按钮/两脚/ 3*6*2.5mm"
TVS1: library part TVS
U2: "LH05-10C0515-01,金升阳,48.5*36*20.5"
U3: library part LM7805, "LM78L05,SOT-89"
U4: library part AMS1117
U5: library part HT7017
U6: library part PS2501-1
U7 U8 U20: library part PS2501-1, "PS2501L-1,SOP4,CEL"
U9: "Bell"
U10: "SP706SEN,SOP8,Sipex"
U11: library part AT24C64, "EEPROM/64K/2.7V/SOP8/ATMEL"
U12: library part TLP113, "TLP114A,5_PIN,TOSHIBA"
U13 U14: "TL431,SOT23/ST/ON"
U15: "LM218D,SOP-8,TI"
U16: library part ZMPT107
U17: library part HCNR200, "HCNR201,DIP8,HP"
U18 U19: library part AS358P-E1, "LM258,SOIC8,TI"
U22: library part MAX232ESE, "NSOIC"
Y1 Y2: library part CRYSTAL, "32.768KHz晶振/圆柱形/2*6mm"
Y3: library part CRYSTAL
Y4: library part CRYSTAL, "Crystal"

## Free pads (board coordinates)
  round 1 all layers, no hole: 0(-0.75,5) 0(-0.75,110) 0(2.184,15.748) 0(99.212,107.493) 0(220.75,5) 0(221,110)
  round 9 hole 4.5: 1(5,8) 1(5.004,111.989) 1(105.004,8.001)

## Via types
v1: diameter 0.711, hole 0.406, Top Layer to Bottom Layer, tented both sides, 452 vias
v2: diameter 1.27, hole 0.711, Top Layer to Bottom Layer, tented both sides, 13 vias

## Nets (pads, with @x,y where several pads share a name; then routed paths per layer and width w, separated by ;. In a path a pad name is that pad's centre, name@x,y a point inside that pad or via, vN(x,y) a via of type N, cw(c..) or ccw(c..) an arc to the next point about the centre after c; other vN are vias at no path point)
//LED_DATA1: J5.1 U1.27 | length 26.8
  Top Layer w0.254: U1.27@54.574,99.006 54.619,99.051 54.619,106.849 57.27,109.499 65.43,109.499 65.862,109.931 65.862,116.281 J5.1@65.837,116.307
/RST: C50.2 C51.2 R38.2 R48.2 U1.7 | length 23
  Top Layer w0.254: U1.7@61.824,92.256 63.173,92.256 64.033,93.116 C51.2@65.088,93.116 65.9,93.929 69.19,93.929 71.78,96.52 R38.2@81.344,96.52 81.344,95.047 R48.2@81.521,94.869
ACL: F1.2 J4.1 RL1.3 | length 76.4
  Bottom Layer w1.5: J4.1@15.875,10.008 15.875,17.932 15.088,18.72 10.439,18.72 9.042,20.117 9.042,32.055 10.185,33.198 46.05,33.198 52.019,27.229 RL1.3@52.019,24.359
ACL1: F1.1 MOV1.2 R58.1 U2.3 | length 75.2
  Top Layer w1: R58.1@8.636,43.866 40.589,43.866 42.142,42.313 U2.3@42.142,26.283
  Top Layer w1.5: F1.1@20.853,17.247 29.591,17.247 34.315,21.971 37.83,21.971 U2.3@42.142,26.283
ACN: J4.3 J6.1 MOV1.1 R19.1 U2.2 U16.4 | length 84.5
  Top Layer w1: U16.4@2.115,52.278 2.115,37.567 3.944,35.738 28.27,35.738 29.642,34.366 U2.2@29.642,26.334
  Bottom Layer w1.5: U2.2@29.693,25.775 37.075,18.393 MOV1.1@37.075,16.747 39.192,16.747 ; J4.3@31.115,10.008 39.065,10.008 J6.1@39.091,9.982 39.091,16.645 39.192,16.747 ; R19.1@43.129,16.713 43.096,16.747 39.192,16.747
ASS5V: C2.2@105.22,39.929 C61.2 C62.1 DC1.1 U3.1 U17.2 U18.8 | length 36.3
  Top Layer w0.381: U17.2@97.081,54.754 97.081,56.746 97.765,57.429 106.426,57.429 106.985,56.871 106.985,49.784 106.591,49.39 C62.1@105.207,49.39 ; U18.8@102.127,49.384 102.134,49.39 C62.1@105.207,49.39 ; U3.1@105.207,37.586 C62.1@105.207,49.39
ASS_+15V: C1.2@100.33,37.529 C17.1 C46.1 C47.1 D1.2 EC1.1 EC2.1 R13.2 R24.2 R26.2 R31.1 R39.1 R72.2 RL1.2 U2.8 U3.3 U6.4 U12.6 U15.7 | length 178.5
  Top Layer w0.508: U15.7@85.897,44.609 90.545,44.609 90.653,44.501 ; U12.6@88.972,57.054 88.972,52.544 C47.1@88.976,52.54
  Top Layer w0.762: U6.4@53.663,56.182 53.663,53.83 56.629,50.863 R26.2@60.096,50.863 v1@63.246,50.863 ; C17.1@54.216,43.891 56.401,43.891 R13.2@56.426,43.917 D1.2@56.426,41.218 ; RL1.2@59.639,37.059 56.642,37.059 56.026,37.675 D1.2@56.026,40.818 D1.2@56.426,41.218 ; v1(63.235,50.84) EC2.1@63.235,46.482 63.235,42.432 62.433,41.631 56.839,41.631 D1.2@56.426,41.218 ; v1(67.945,50.851) 67.958,50.838 R24.2@69.24,50.838 ; v1(76.886,50.851) 76.899,50.863 R72.2@78.029,50.863 ; R31.1@87.287,50.851 87.236,50.902 R39.1@87.236,52.527 90.272,52.527 90.653,52.146 v1(90.653,50.851) 90.653,44.501 90.653,25.171 v1(90.678,25.146) ; v1@100.406,25.146 EC1.1@100.406,28.615 100.33,28.691 C1.2@100.33,37.529 102.156,37.529 U3.3@102.213,37.586
  Top Layer w1.778: v2(60.452,46.507) 60.477,46.482 EC2.1@63.235,46.482
  Bottom Layer w0.762: v1(63.235,50.84) v1@63.246,50.851 ; v1@63.235,50.851 v1@63.246,50.851 ; v1(90.653,50.851) v1(76.886,50.851) v1(67.945,50.851) v1@63.246,50.851 ; v1(90.678,25.146) v1(100.406,25.146)
  Bottom Layer w1.778: U2.8@37.693,66.275 37.693,52.833 44.018,46.507 v2(60.452,46.507)
ASS_-15V: C52.2 EC3.2 U2.6 U15.4 | length 70.3
  Top Layer w0.508: EC3.2@75.268,42.088 EC3.2@75.284,42.071 75.287,42.069 U15.4@80.817,42.069
  Top Layer w0.889: v2(73.609,42.088) EC3.2@75.268,42.088
  Bottom Layer w0.889: U2.6@29.693,66.275 29.693,50.571 38.176,42.088 v2(73.609,42.088)
ASS_GND: C1.1@100.33,39.179 C2.1@103.569,39.929 C46.2 C47.2 C52.1 C53.2 C59.2 C60.2 C61.1 C62.2 D5.1 DC1.2 DC2.2 DC3.2 EC1.2 EC2.2 EC3.1 J9.2 J10.2 J10.4 LT1.1 Q2.3 R22.2 R43.2 R54.1 R55.1 R69.1 U2.7 U3.2 U12.4 U14.2 U17.4 U18.3 U18.4 | length 93.3
  Top Layer w0.381: v1(63.271,38.075) 63.255,38.091 EC2.2@63.255,39.93 66.038,39.93 v1(66.04,39.929) ; v1(68.682,44.678) 68.732,44.678 EC3.1@68.732,42.051 68.732,39.37 v1(68.707,39.345) ; C52.1@77.902,43.752 77.902,44.755 v1(77.927,44.78) ; U14.2@81.227,31.083 v1(81.229,32.334) v1(81.229,32.334) ; v1(82.169,23.749) C53.2@82.169,24.828 ; R54.1@83.045,21.26 84.074,21.26 v1(84.125,21.311) ; C46.2@88.519,46.291 88.519,47.117 v1(88.544,47.142) ; v1(88.646,20.472) D5.1@88.646,21.933 ; v1(89.154,48.082) 89.167,48.095 R43.2@89.167,49.098 ; C59.2@95.237,34.29 96.495,34.29 v1(96.52,34.315) ; v1(95.275,44.78) 95.313,44.742 R69.1@95.313,43.79 ; C60.2@95.314,39.218 95.377,39.154 v1(95.377,38.049) ; DC2.2@97.03,31.864 v1(98.641,31.864) ; U18.4@97.047,45.574 98.99,45.574 v1(99.009,45.593) ; U18.3@97.047,46.844 99.003,46.844 v1(99.009,46.838) ; DC3.2@97.055,36.766 98.794,36.766 v1(98.806,36.754) ; v1(100.305,40.157) 100.33,40.132 C1.1@100.33,39.179 ; v1(100.457,20.701) 100.508,20.65 LT1.1@100.508,18.948 ; v1(101.729,41.023) 101.75,41.023 DC1.2@101.75,42.685 ; v1(102.157,52.576) 102.161,52.576 U17.4@102.161,54.754 ; v1(102.54,39.929) C2.1@103.569,39.929 ; U3.2@103.687,34.906 103.687,32.634 v1(103.708,32.614) ; v1(103.708,38.76) 103.713,38.756 U3.2@103.713,37.319 ; C62.2@105.207,51.549 v1(105.207,52.883) ; C61.1@106.845,47.015 107.925,47.015 v1(107.95,46.99) ; v1(106.985,25.324) 106.958,25.351 EC1.2@106.958,28.635 108.779,28.635 v1(108.788,28.626)
  Bottom Layer w0.381: v1(88.544,47.142) v1@88.544,47.244 ; v1(88.646,20.472) v1@88.671,20.447 ; v1(98.641,31.864) v1@98.654,31.852 ; v1@100.432,20.701 v1(100.457,20.701) ; v1@101.727,41.021 v1(101.729,41.023) ; v1@102.133,52.553 v1(102.157,52.576)
  Bottom Layer w2.54: U2.7@33.693,66.275 33.693,51.397 41.11,43.98 61.163,43.98
  other v1: 69.5,10 90,10.5 69.5,12.5 73.5,12.5 75,12.5 77.5,12.5 80,12.5 69.5,15 69.5,17.5 73.5,17.5 69.5,20 69.5,22.5 73.5,22.5 105,22.5 69.5,25 69.5,27.5 73.5,27.5 69.5,30 108,31.5 69.5,32.5 73.5,32.5 92,32.5 69.5,35 92,35 108,35 62.5,37.5 65,37.5 67.5,37.5 69.5,37.5 73.5,37.5 92,37.5 108,39 77.5,40 80,40 82.5,40 85,40 87.5,40 92,40 92,42.5 108,42.5 50.5,43.5 59.5,43.5 60.5,43.5 61.5,43.5 64.5,43.5 65.5,43.5 66.5,43.5 62,44 50.5,44.5 59.5,44.5 60.5,44.5 61.5,44.5 64.5,44.5 65.5,44.5 66.5,44.5 92,45 92,47.5 60,48.5 55,49 92,50 97,51.5 57.5,52.5 65,52.5 75,52.5 82.5,52.5 92,52.5 105,55 85.5,57 57.5,57.5 65,57.5 75,57.5 82.5,57.5 92.5,57.5
COM1-RX: J13.2 R82.2 | length 7.6
  Top Layer w0.254: R82.2@96.749,95.72 96.749,100.736 97.053,101.041 J13.2@97.053,103.2
COM1-TX: J13.1 R83.2 | length 7.8
  Top Layer w0.254: J13.1@94.513,103.2 94.513,101.448 95.25,100.711 R83.2@95.25,95.72
CON-A: C63.2 C64.2 R70.2 R71.1 U1.11 | length 52.9
  Top Layer w0.254: U1.11@61.824,94.256 64.626,94.256 C63.2@65.088,94.717 65.837,95.466 68.44,95.466 71.222,98.247 89.967,98.247 90.297,97.917 90.297,80.035 91.262,79.07 C64.2@91.554,79.07 ; R70.2@91.3,75.921 C64.2@91.3,79.045
CP: D6.1 J9.3 L4.1 TVS1.2 | length 16.8
  Top Layer w1.016: L4.1@88.096,15.672 TVS1.2@92.253,15.672 ; TVS1.2@92.539,15.672 TVS1.2@92.253,15.672 ; TVS1.2@93.098,14.834 93.098,8.274 J9.3@93.116,8.255 ; D6.1@93.098,19.38 93.098,14.84 93.091,14.834 TVS1.2@92.253,15.672
CP_OUT: C48.2 D2.1 R23.1 R28.1 R29.2 R30.2 U13.2 | length 31
  Top Layer w0.381: R23.1@75.616,30.69 75.616,37.973 76.116,38.474 R30.2@85.371,38.474 87.274,38.474 ; U13.2@88.492,30.956 88.492,33.606 87.274,34.823 87.274,38.474 ; R28.1@88.544,40.983 88.544,38.475 C48.2@88.546,38.474 87.274,38.474
CPWM_OUT: R45.1 U1.58 | length 42.4
  Top Layer w0.254: U1.58@56.574,87.006 56.574,77.005 60.757,72.822 R45.1@87.287,72.822
DGND: C1.1@29.058,142.405 C1.1@101.058,142.405 C1.1@173.058,142.405 C2.1@62.04,130.835 C2.1@134.04,130.835 C2.1@206.04,130.835 C3.1@39.103,140.792 C3.1@111.103,140.792 C3.1@183.103,140.792 C3.2@94.806,109.931 C4.1@95.288,112.014 C4.2@62.548,128.549 C4.2@134.548,128.549 C4.2@206.548,128.549 C5.2 C6.2@17.501,75.4 C7.2 C8.2 C9.2 C10.2 C11.2 C12.2 C13.2 C14.2 C15.2 C16.2 C18.2 C19.2 C20.2 C23.2 C24.2 C25.2 C26.2 C27.1 C28.2 C29.2 C30.2 C31.2 C32.2 C33.2 C34.2 C35.2 C36.2 C37.2 C38.2 C39.2 C40.2 C41.2 C42.2 C44.1 C45.2 C49.1 C50.1 C51.1 C54.2 C55.2 C56.2 C57.2 C63.1 C64.1 C65.1 C66.1 C67.2 C69.2 C71.2 C72.1 C73.2 C74.2 C75.1 C76.1 C80.1 C81.1 C103.2 D4.1 EC4.2 EC5.2 J1.15 J1.20 J1.21 J1.22 J2.2 J3.2@56.378,130.454 J3.2@128.378,130.454 J3.2@200.378,130.454 J3.3 J5.5 J7.2 J8.5 J12.1 J13.3 J13.5 L1.2 Q1.3 Q3.3 R7.1@38.023,73.787 R10.1 R20.2 R49.1 R57.1 R59.1 R60.2 R61.2 R71.2 SW1.2 SW2.1 SW4.2 U1.12 U1.18 U1.31 U1.47 U1.63 U2.4 U4.1 U5.8 U7.3 U8.3 U10.3 U10.4 U11.1 U11.2 U11.3 U11.4 U11.7 U12.3 U17.5 U19.3 U19.4 U20.3 U21.3 U21.7 U21.8 U21.11 U21.16 U21.20 U22.15 | length 221.2
  Top Layer w0.254: v1(29.032,143.383) 29.058,143.358 C1.1@29.058,142.405 ; 38.1,134.544 37.948,134.695 J1.15@37.948,136.639 37.948,138.272 39.624,139.948 39.624,141.313 ; C3.1@39.103,140.792 39.624,141.313 ; v1@39.624,144.145 v1(39.624,144.12) 39.624,141.313 ; v1@39.637,144.12 C5.2@39.637,142.9 39.637,141.326 39.624,141.313 ; J1.20@40.448,136.639 40.448,137.248 41.351,138.151 ; C7.2@43.129,142.405 v1(43.129,143.383) ; v1(47.904,90.018) 48.166,89.756 U1.47@49.824,89.756 51.265,89.756 51.283,89.738 ; v1(52.5,97.5) 52.574,97.574 U1.31@52.574,99.006 ; v1@58.826,85.852 58.826,85.877 59.074,86.125 U1.63@59.074,87.006 59.074,88.45 59.03,88.494 ; U1.18@59.074,99.006 59.074,99.79 v1(59.411,100.127) ; v1(60,95) 60.244,94.756 U1.12@61.824,94.756 ; C2.1@62.04,130.835 63.119,130.835 v1(63.144,130.861) ; C4.2@62.548,128.549 62.548,127.038 v1(62.56,127.025) ; v1(93.142,109.982) 93.193,109.931 C3.2@94.806,109.931 ; v1(94.107,112.065) 94.158,112.014 C4.1@95.288,112.014 ; v1(101.032,143.383) 101.058,143.358 C1.1@101.058,142.405 ; 110.1,134.544 109.948,134.695 J1.15@109.948,136.639 109.948,138.272 111.624,139.948 111.624,141.313 ; C3.1@111.103,140.792 111.624,141.313 ; v1@111.624,144.145 v1(111.624,144.12) 111.624,141.313 ; v1@111.637,144.12 C5.2@111.637,142.9 111.637,141.326 111.624,141.313 ; J1.20@112.448,136.639 112.448,137.248 113.351,138.151 ; C7.2@115.129,142.405 v1(115.129,143.383) ; C2.1@134.04,130.835 135.119,130.835 v1(135.144,130.861) ; C4.2@134.548,128.549 134.548,127.038 v1(134.56,127.025) ; v1(173.032,143.383) 173.058,143.358 C1.1@173.058,142.405 ; 182.1,134.544 181.948,134.695 J1.15@181.948,136.639 181.948,138.272 183.624,139.948 183.624,141.313 ; C3.1@183.103,140.792 183.624,141.313 ; v1@183.624,144.145 v1(183.624,144.12) 183.624,141.313 ; v1@183.637,144.12 C5.2@183.637,142.9 183.637,141.326 183.624,141.313 ; J1.20@184.448,136.639 184.448,137.248 185.351,138.151 ; C7.2@187.129,142.405 v1(187.129,143.383) ; C2.1@206.04,130.835 207.119,130.835 v1(207.144,130.861) ; C4.2@206.548,128.549 206.548,127.038 v1(206.56,127.025)
  Top Layer w0.381: v1(2.235,73.076) R61.2@3.213,73.076 ; C103.2@5.029,105.283 v1(6.299,105.283) ; R59.1@7.912,73.083 9.01,73.083 v1@9.017,73.076 ; v1(7.976,86.843) R60.2@7.976,87.643 ; R57.1@7.976,92.291 v1(7.976,93.269) ; v1(8.357,85.623) C24.2@9.512,85.623 ; C72.1@9.474,101.13 v1(9.474,102.083) ; v1(10.084,96.317) C13.2@11.443,96.317 ; v1(10.566,71.933) 10.552,71.919 U4.1@10.552,73.733 10.552,75.5 v1(10.566,75.514) ; v1(10.947,94.259) 10.947,94.285 C14.2@11.951,94.285 ; C73.2@10.947,101.13 v1(10.947,102.083) ; C54.2@13.335,92.342 v1(13.335,93.193) ; v1(13.36,86.639) C56.2@13.36,87.49 ; v1(15.088,86.106) C57.2@15.964,86.106 ; U5.8@16.279,88.379 16.279,87.709 v1(16.281,87.706) ; C6.2@17.501,75.4 v1(17.501,76.302) ; C75.1@17.628,107.658 17.628,106.909 v1(17.653,106.883) ; v1(18.161,114.3) 18.136,114.325 C69.2@19.317,114.325 ; C8.2@19.571,80.569 20.574,80.569 v1(20.599,80.543) ; C5.2@20.041,75.933 20.041,77.114 v1(20.066,77.14) ; C7.2@20.104,78.562 v1(21.285,78.562) ; v1(20.574,85.242) 20.587,85.255 C55.2@20.587,86.106 ; v1(21.234,94.259) 21.26,94.285 C10.2@22.365,94.285 ; U21.3@22.978,101.527 22.978,103.369 v1(22.987,103.378) ; v1(22.987,80.289) 22.989,80.288 EC4.2@25.67,80.288 v1(28.346,80.289) v1(28.346,80.289) ; C12.2@23.66,86.106 24.74,86.106 v1(24.74,86.157) ; v1(25.502,113.538) 25.518,113.522 U21.20@25.518,111.687 ; v1(26.441,114.3) 26.467,114.325 C71.2@27.648,114.325 ; v1(28.042,99.72) 28.058,99.737 U21.7@28.058,101.527 ; C28.2@28.512,88.392 29.464,88.392 v1(29.489,88.367) ; C23.2@28.512,92.786 v1(29.489,92.786) ; C19.2@28.537,94.285 v1(29.489,94.285) ; C18.2@29.045,96.266 v1(30.302,96.266) ; v1(29.319,99.72) 29.328,99.711 U21.8@29.328,101.527 ; U21.16@30.598,111.687 30.598,109.661 v1(30.607,109.652) ; v1(31.902,96.012) C76.1@31.902,97.066 ; U21.11@33.138,101.527 33.138,99.73 v1(33.147,99.72) ; v1(34.773,92.126) 34.796,92.102 EC5.2@37.906,92.102 38.81,92.102 v1(40.208,90.703) ; v1(37.973,76.149) 38.023,76.099 R7.1@38.023,73.787 ; L1.2@38.051,78.985 40.014,78.985 v1(40.03,78.969) ; v1(40.056,109.982) 40.062,109.988 U11.1@42.056,109.988 ; v1(40.081,108.737) 40.1,108.718 U11.2@42.056,108.718 ; v1(40.132,107.544) 40.132,107.115 41.068,106.178 U11.4@42.056,106.178 ; v1(42.774,89.992) 42.774,89.967 C33.2@44.056,89.967 ; v1(43.612,88.138) C30.2@44.717,88.138 ; v1(45.491,113.309) 45.504,113.297 C27.1@45.504,112.319 ; U11.7@47.136,108.718 49.054,108.718 v1(49.073,108.737) ; v1(48.006,72.085) 48.528,71.564 Q1.3@50.214,71.564 ; v1(48.692,105.41) 49.162,105.41 C35.2@49.936,104.635 ; v1(50.216,82.372) 50.23,82.358 SW2.1@51.766,82.358 ; v1(50.47,74.32) 50.483,74.308 R20.2@50.483,73.228 ; C36.2@51.816,104 v1(51.816,105.156) ; C42.2@52.108,110.007 v1(53.315,110.007) ; C44.1@52.616,107.975 v1(53.95,107.975) ; R10.1@53.848,104.026 v1(53.848,105.131) ; v1(58.852,105.004) 58.877,104.978 C34.2@58.877,104.026 ; C32.2@59.588,82.105 59.588,81.153 v1(59.614,81.128) ; v1(60.706,105.664) 60.706,105.715 60.731,105.74 C29.2@60.731,104.585 ; v1(61.443,80.34) C31.2@61.443,81.623 ; C41.2@61.709,69.418 62.789,69.418 v1(62.738,69.469) ; U8.3@62.619,65.326 62.619,67.394 v1(62.636,67.412) ; C26.2@63.983,83.757 63.995,83.744 v1(64.897,83.744) ; v1(64.008,79.4) C9.2@64.008,80.328 ; C63.1@66.739,94.717 v1(67.894,94.717) ; C38.2@66.739,96.368 v1(67.894,96.368) ; C37.2@66.739,97.866 v1(67.869,97.866) ; C11.2@68.631,88.1 69.634,88.1 v1(69.672,88.062) ; C20.2@68.631,93.155 69.71,93.155 v1(69.723,93.167) ; v1(68.656,82.677) C39.2@68.656,83.655 ; C40.2@70.904,69.418 71.755,69.418 v1(71.78,69.393) ; U7.3@71.788,65.326 71.788,67.445 v1(71.806,67.462) ; v1(75.032,109.931) C16.2@76.391,109.931 ; v1(75.768,111.989) 75.768,112.014 C15.2@76.924,112.014 ; v1(79.654,93.828) C50.1@79.654,94.907 ; C67.2@79.693,69.418 80.569,69.418 v1(80.594,69.393) ; U20.3@80.576,65.326 80.576,67.445 v1(80.594,67.462) ; v1(81.991,93.37) C49.1@83.02,93.37 ; v1(83.972,70.256) 83.998,70.282 D4.1@85.509,70.282 ; v1(86.004,83.49) 86.024,83.509 U10.3@86.024,85.312 ; U12.3@86.432,64.454 86.432,66.137 v1(86.462,66.167) ; C45.2@86.462,80.454 87.338,80.454 v1(87.376,80.416) ; v1(86.512,78.207) 86.533,78.186 SW4.2@86.533,76.835 ; U10.4@87.294,85.312 87.294,83.496 v1(87.3,83.49) ; Q3.3@91.848,91.421 91.848,92.356 v1(91.872,92.38) ; C64.1@92.951,79.045 92.951,79.972 v1(92.964,79.985) ; R71.2@92.977,77.419 v1(94.056,77.419) ; v1(94.234,70.434) 94.25,70.419 U19.4@96.346,70.419 ; v1(94.234,71.704) 94.25,71.689 U19.3@96.346,71.689 ; v1(95.047,92.024) 95.06,92.037 C80.1@96.063,92.037 ; U17.5@102.161,66.754 103.883,66.754 v1(103.886,66.751) ; C66.1@104.267,72.53 104.267,71.526 v1(104.292,71.501) ; v1(106.375,70.714) C65.1@106.375,72.047 ; v1(107.264,99.72) 107.29,99.695 C81.1@107.29,98.565
  Top Layer w2.032: U2.4@21.693,66.275 21.693,71.646 v1@21.7,71.653
  Bottom Layer w0.254: 42.367,138.481 42.367,138.506 ; v1@58.598,85.852 v1@58.826,85.852 ; 114.367,138.481 114.367,138.506 ; 186.367,138.481 186.367,138.506
  Bottom Layer w0.381: v1@7.976,93.243 v1(7.976,93.269) ; v1@9.449,102.057 v1(9.474,102.083) ; v1@20.549,80.543 v1(20.599,80.543) ; v1@29.312,99.72 v1(29.319,99.72) ; v1@29.439,88.417 v1(29.489,88.367) ; v1(30.607,109.652) v1@30.658,109.652 ; v1(40.132,107.544) v1@40.132,107.569 ; v1(60.706,105.664) v1@60.706,105.766 ; v1(64.008,79.4) v1@64.033,79.375 ; v1@86.004,83.414 v1(86.004,83.49) ; v1@91.846,92.405 v1(91.872,92.38)
  Bottom Layer w2.032: U2.4@21.693,66.275 21.693,72.193 v1(22,72.5)
  other v1: 104.902,64.465 108.077,64.516 91.415,64.846 74.981,64.948 83.998,64.973 66.726,65.1 57.125,65.278 67.5,70 75,70 107.5,70 21,71.5 22,71.5 21,72.5 8.992,73.076 90,73.75 2.5,75 22.5,75 35,75 42.5,75 47.5,75 90,76.25 90,78.75 2.5,80 4.5,80 6.629,80.01 52.5,80 77.5,80 97.5,80 107.5,80 91.5,81 6.629,81.483 4.5,81.5 9,81.5 11,81.5 14,81.5 16,81.5 9,84 14,84 5.5,84.5 15.5,84.5 91.5,84.5 77.5,85 97.5,85 107.5,85 39.853,85.547 35.611,85.598 32.766,85.623 58.75,85.75 2.5,87.5 86.25,87.75 5.5,88.5 35,89 40,89 91.5,89.771 52.5,90 55,90 57.5,90 60,90 77.5,90 5.5,91.5 12,92 52.5,92.5 55,92.5 57.5,92.5 60,92.5 102.184,93.421 2.5,95 17.5,95 40,95 52.5,95 55,95 57.5,95 77.5,95 102.133,97.053 76.55,97.425 72.225,97.45 74.125,97.45 78.525,97.45 55,97.5 57.5,97.5 60,97.5 70,98.5 93.675,98.527 49,99 2.5,100 90.729,100 61.036,100.33 40,100.5 102.133,100.813 45.5,101 95.91,101.498 35.865,103.48 45,103.5 108.966,107.239 12.5,107.5 15,107.5 25,107.5 30,107.5 93.828,107.544 45,109 90.5,109.144 85.496,109.169 88.011,109.169 35.941,109.322 12.5,110 61.98,112.039 66.98,112.039 35.916,112.293 27.5,117.5 50,117.5 62.5,117.5 100,117.5 107.5,117.5 11.557,118.593 12.5,122.54 17.5,122.54 22.5,122.54 27.5,122.54 62.5,122.54 84.5,122.54 89.5,122.54 94.5,122.54 99.5,122.54 134.5,122.54 156.5,122.54 161.5,122.54 166.5,122.54 171.5,122.54 206.5,122.54 34.994,127.406 42.494,127.406 106.994,127.406 114.494,127.406 178.994,127.406 186.494,127.406 12.5,127.54 17.5,127.54 22.5,127.54 27.5,127.54 50,127.54 57.5,127.54 84.5,127.54 89.5,127.54 94.5,127.54 99.5,127.54 122,127.54 129.5,127.54 156.5,127.54 161.5,127.54 166.5,127.54 171.5,127.54 194,127.54 201.5,127.54 35,130.04 107,130.04 179,130.04 35,132.54 107,132.54 179,132.54 12.5,135.04 22.5,135.04 35,135.04 47.5,135.04 50,135.04 57.5,135.04 62.5,135.04 84.5,135.04 94.5,135.04 107,135.04 119.5,135.04 122,135.04 129.5,135.04 134.5,135.04 156.5,135.04 166.5,135.04 179,135.04 191.5,135.04 194,135.04 201.5,135.04 206.5,135.04 41.5,137.54 113.5,137.54 185.5,137.54 35.001,138.405 107.001,138.405 179.001,138.405 12.5,142.54 17.5,142.54 22.5,142.54 47.5,142.54 52.5,142.54 57.5,142.54 62.5,142.54 84.5,142.54 89.5,142.54 94.5,142.54 119.5,142.54 124.5,142.54 129.5,142.54 134.5,142.54 156.5,142.54 161.5,142.54 166.5,142.54 191.5,142.54 196.5,142.54 201.5,142.54 206.5,142.54